# Altium PCB Copy of PCB1_ascii.pcbDoc
Units mil, origin at the board's own origin, x right, y up, seen from the top; angles counter-clockwise.
Board outline 1574.8 x 1496.06 mil, 2 copper layers (Top Layer, Bottom Layer); 38 components, 67 nets, 271 pads, 69 vias.
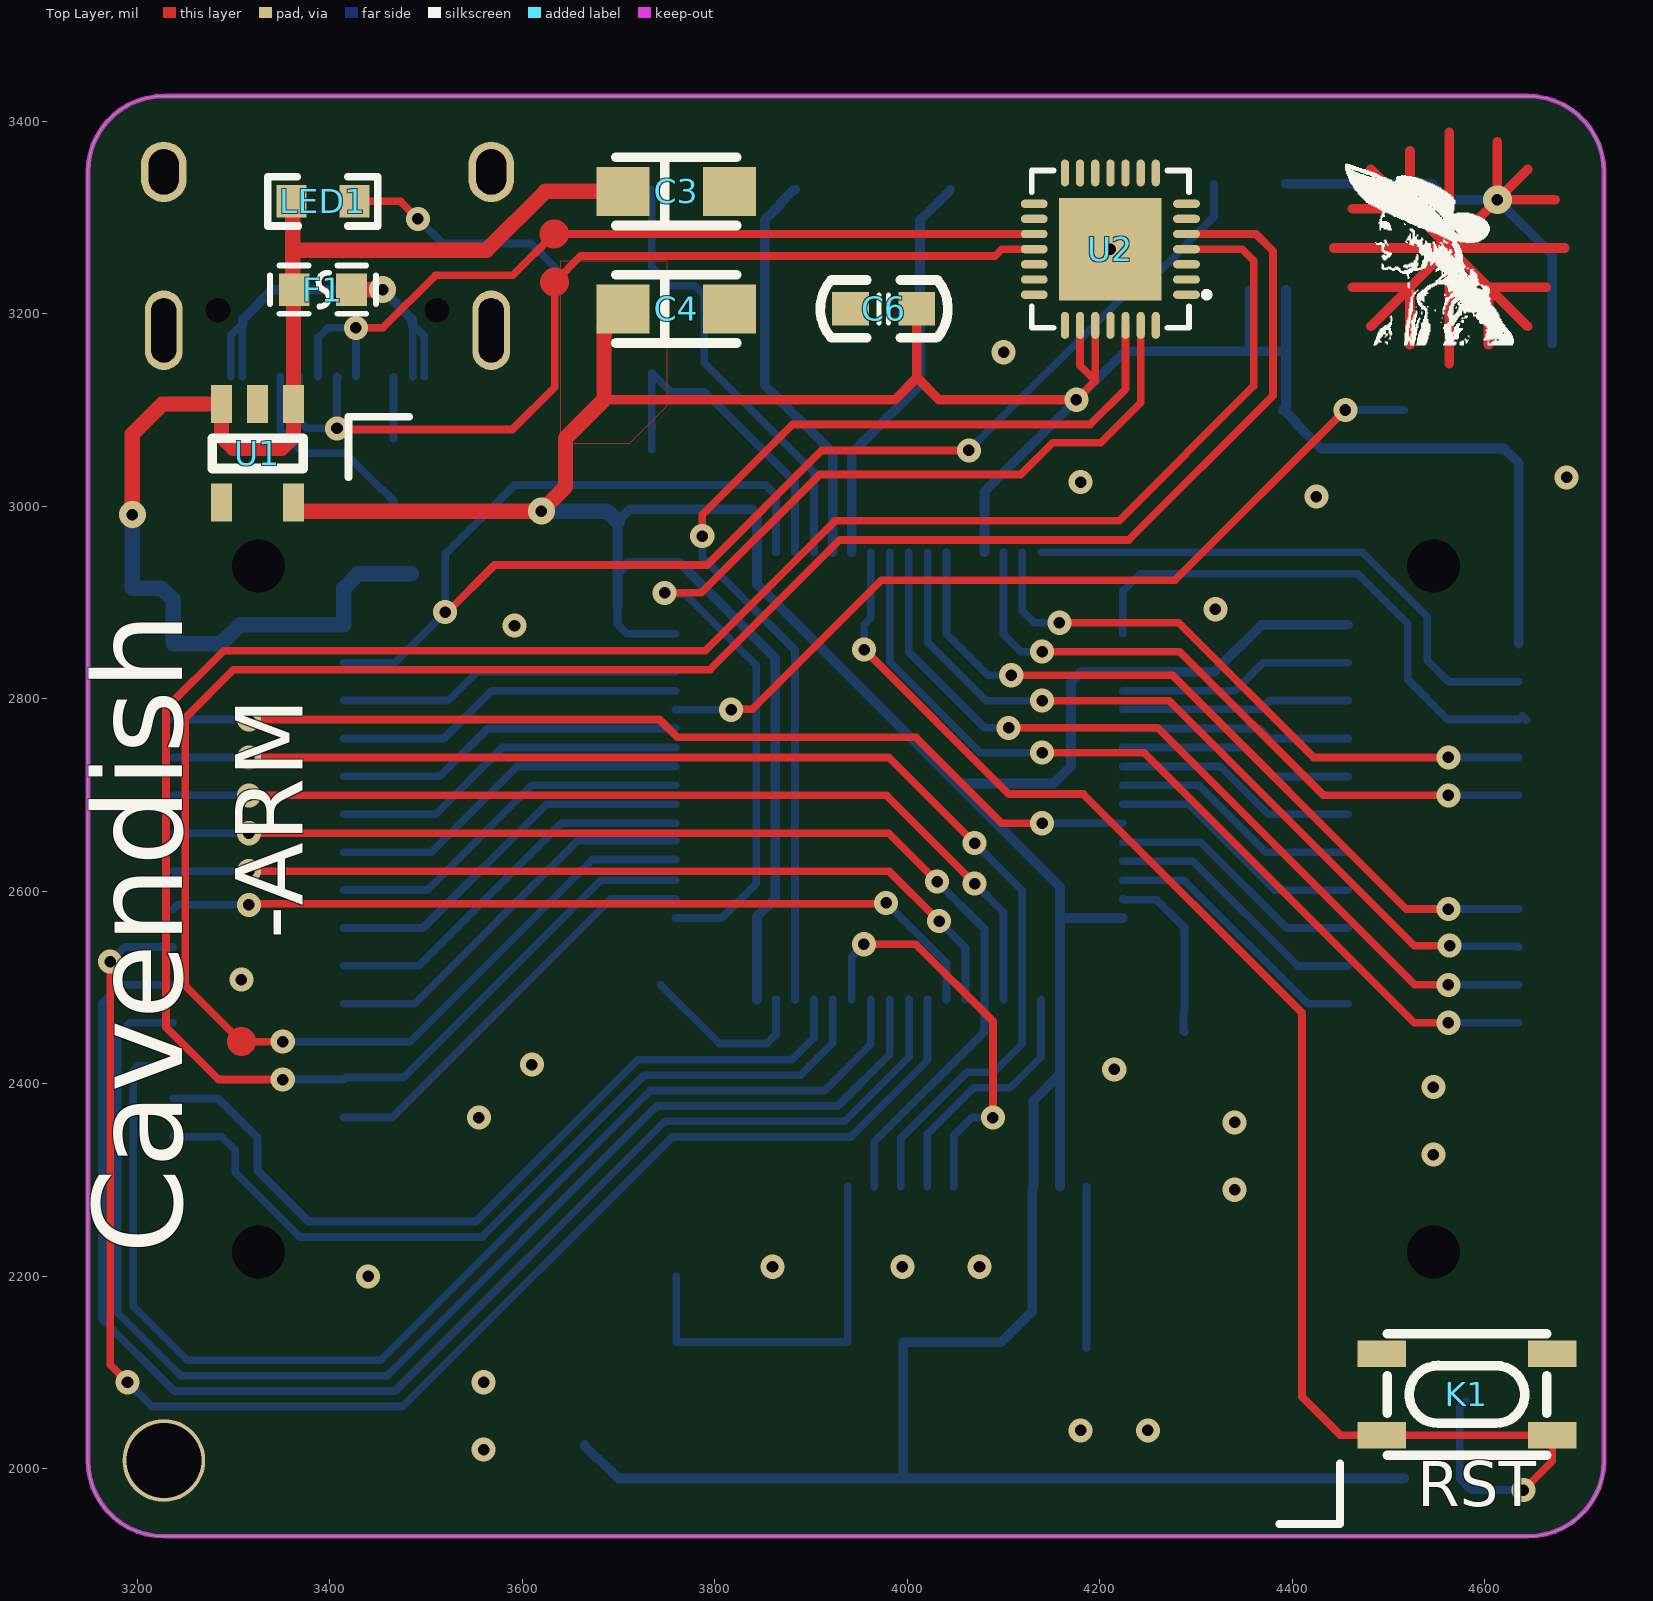
[diagram p0: Top Layer view]
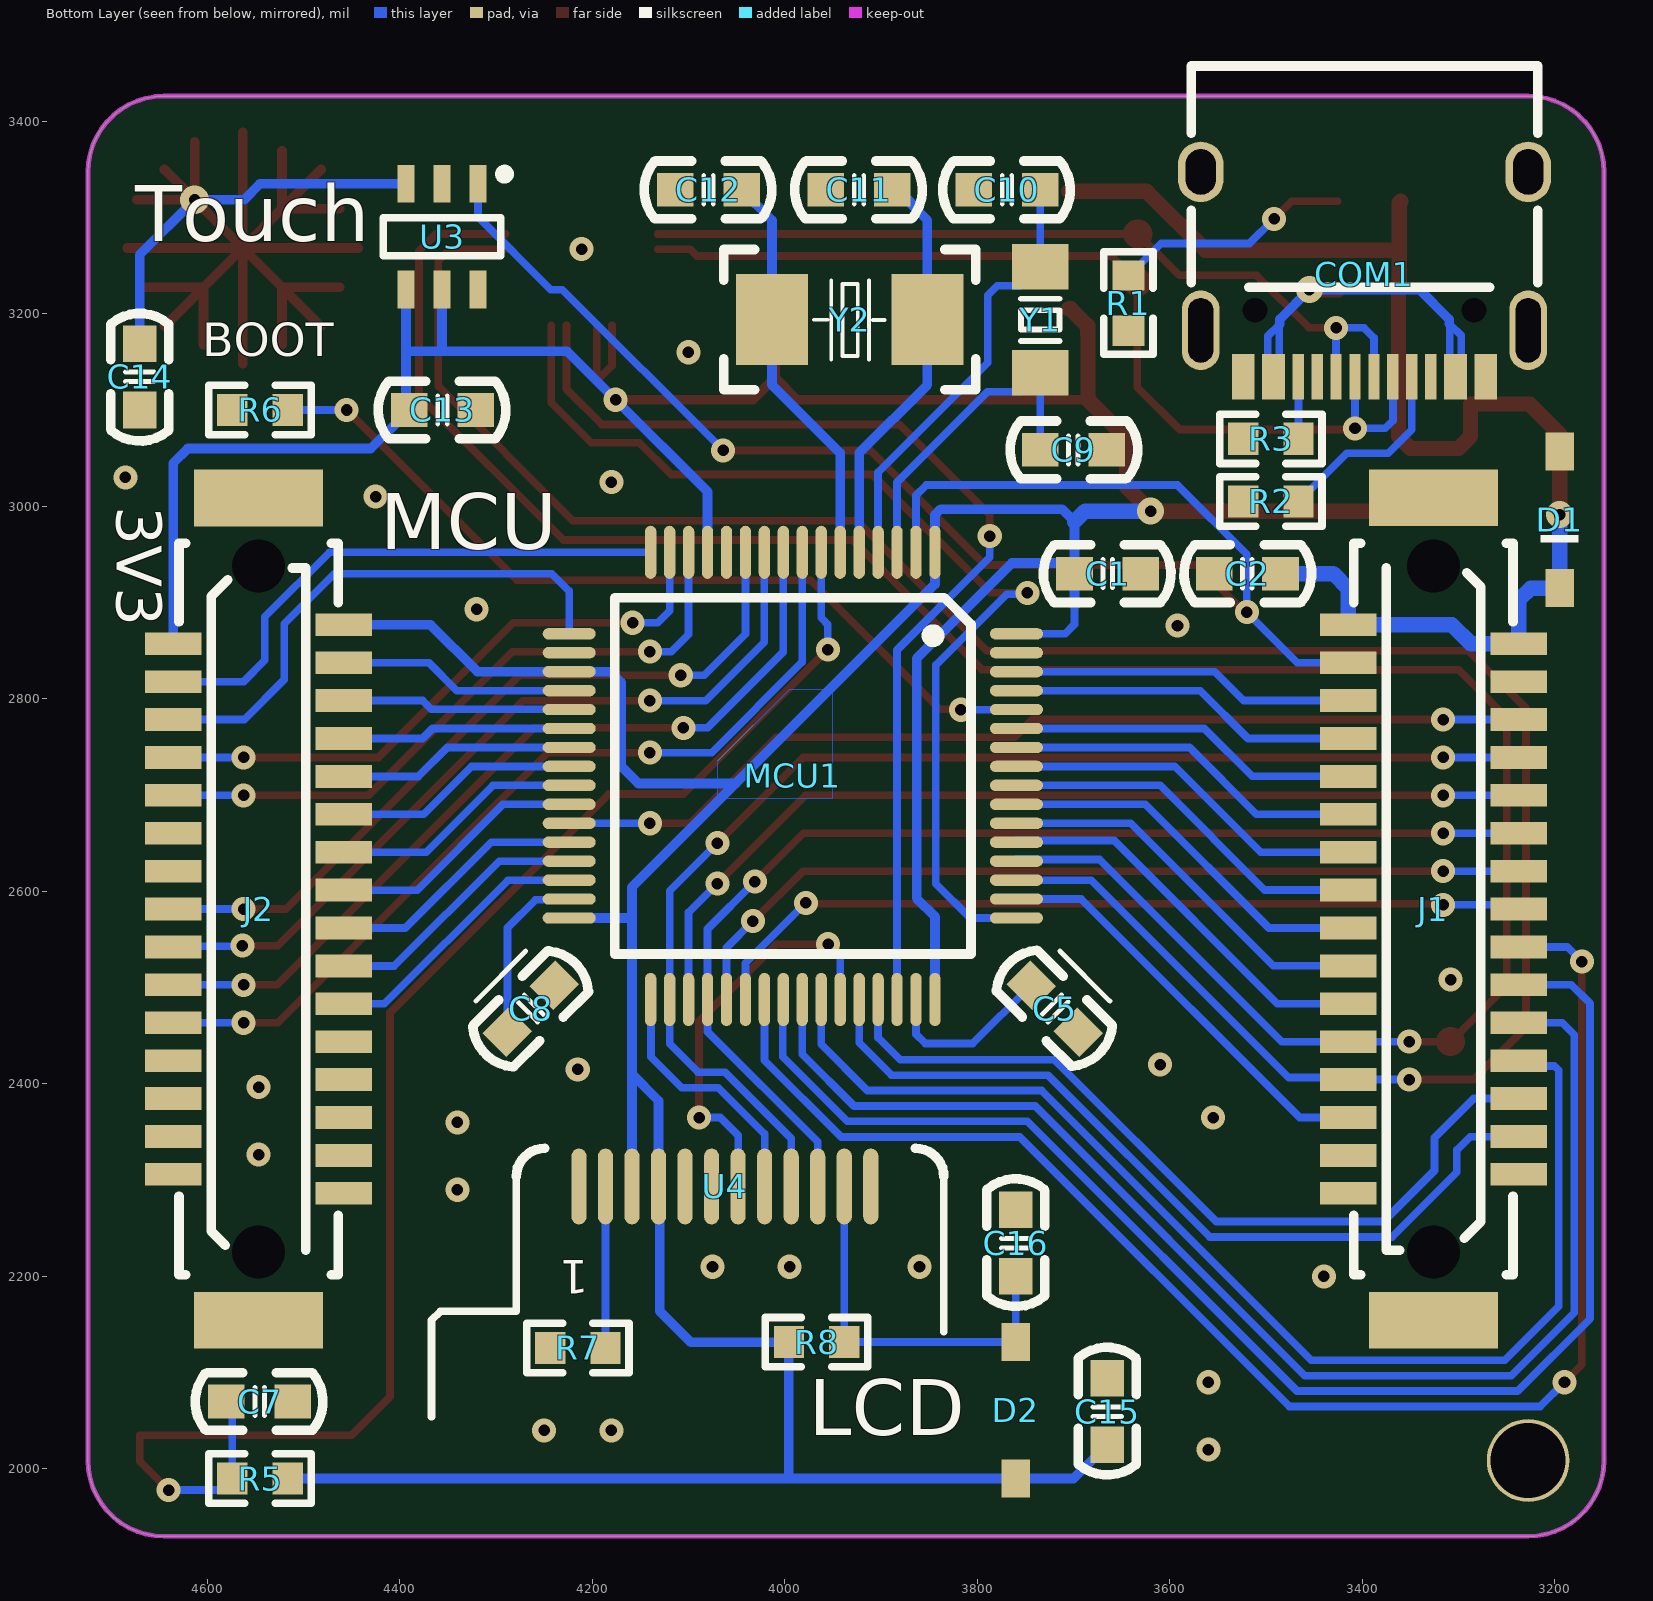
[diagram p1: Bottom Layer view, seen from below]

## Layer stack, top to bottom
Top Solder: solder mask 0.4, Solder Resist, Dk 3.5
Top Layer: signal copper 1.4
Dielectric 1: dielectric 12.6, FR-4, Dk 4.8
Bottom Layer: signal copper 1.4
Bottom Solder: solder mask 0.4, Solder Resist, Dk 3.5

## Board outline
3148.94,2008.74 ccw(c3227.68,2008.74) 3227.68,1930 4645,1930 ccw(c4645,2008.74) 4723.74,2008.74 4723.74,3347.32 ccw(c4645,3347.32) 4645,3426.06 3260.17,3426.06 3227.68,3426.06 ccw(c3227.68,3347.32) 3148.94,3347.32

## Design rules (kind name [scope] priority, off if disabled: settings)
AssemblyTestPointUsage [All] p0: scope1count=1 scope1_0_kind=Board scope1_0_value=Board scope2count=1 scope2_0_kind=Board scope2_0_value=Board commentlength=0
AssemblyTestpoint [All] p0: scope1count=1 scope1_0_kind=Board scope1_0_value=Board scope2count=1 scope2_0_kind=Board scope2_0_value=Board commentlength=0
Clearance [All] p0: scope1count=1 scope1_0_kind=Board scope1_0_value=Board scope2count=1 scope2_0_kind=Board scope2_0_value=Board commentlength=0 gap=7
Clearance [All] p1: gap=7 ignorepadtopadclearanceinfootprint=TRUE
ComponentClearance [All] p0: scope1count=1 scope1_0_kind=Board scope1_0_value=Board scope2count=1 scope2_0_kind=Board scope2_0_value=Board commentlength=0 gap=10 collisioncheckmode=3
DiffPairsRouting [All] p0: scope1count=1 scope1_0_kind=Board scope1_0_value=Board scope2count=1 scope2_0_kind=Board scope2_0_value=Board commentlength=0
FabricationTestPointUsage [All] p0: scope1count=1 scope1_0_kind=Board scope1_0_value=Board scope2count=1 scope2_0_kind=Board scope2_0_value=Board commentlength=0 valid=0 allowmultiple=FALSE
FabricationTestpoint [All] p0: scope1count=1 scope1_0_kind=Board scope1_0_value=Board scope2count=1 scope2_0_kind=Board scope2_0_value=Board commentlength=0 side=3 testpointundercomponent=TRUE minsize=40 maxsize=100 preferedsize=60 minholesize=0 maxholesize=40 preferedholesize=32 testpointgrid=1
FanoutControl Fanout_BGA [All] p0 off: scope1count=1 scope1_0_kind=Board scope1_0_value=Board scope2count=1 scope2_0_kind=Board scope2_0_value=Board commentlength=69 // Protel DXP Scope 1 Expression Was: IsBGA   Fanout_BGA (Default Rule)
FanoutControl Fanout_LCC [All] p0 off: scope1count=1 scope1_0_kind=Board scope1_0_value=Board scope2count=1 scope2_0_kind=Board scope2_0_value=Board commentlength=69 // Protel DXP Scope 1 Expression Was: IsLCC   Fanout_LCC (Default Rule)
FanoutControl Fanout_SOIC [All] p0 off: scope1count=1 scope1_0_kind=Board scope1_0_value=Board scope2count=1 scope2_0_kind=Board scope2_0_value=Board commentlength=71 // Protel DXP Scope 1 Expression Was: IsSOIC   Fanout_SOIC (Default Rule)
FanoutControl Fanout_Small [All] p0 off: scope1count=1 scope1_0_kind=Board scope1_0_value=Board scope2count=1 scope2_0_kind=Board scope2_0_value=Board commentlength=84 // Protel DXP Scope 1 Expression Was: (CompPinCount < 5)   Fanout_Small (Default Rule)
FanoutControl Fanout_Default [All] p0: scope1count=1 scope1_0_kind=Board scope1_0_value=Board scope2count=1 scope2_0_kind=Board scope2_0_value=Board commentlength=30 // Fanout_Default (Default Rule)
Height [All] p0: scope1count=1 scope1_0_kind=Board scope1_0_value=Board scope2count=1 scope2_0_kind=Board scope2_0_value=Board commentlength=0
HoleSize [All] p0: scope1count=1 scope1_0_kind=Board scope1_0_value=Board scope2count=1 scope2_0_kind=Board scope2_0_value=Board commentlength=0 absolutevalues=TRUE maxlimit=400 minlimit=1 maxpercent=80.000 minpercent=20.000
HoleSize [All] p1: absolutevalues=TRUE maxlimit=400 minlimit=1 maxpercent=80.000 minpercent=20.000
HoleToHoleClearance [All] p0: scope1count=1 scope1_0_kind=Board scope1_0_value=Board scope2count=1 scope2_0_kind=Board scope2_0_value=Board commentlength=0
HoleToHoleClearance [All] p1: gap=6 allowstackedmicrovias=TRUE
LayerPairs [All] p0: scope1count=1 scope1_0_kind=Board scope1_0_value=Board scope2count=1 scope2_0_kind=Board scope2_0_value=Board commentlength=0 enforce=TRUE
MinimumSolderMaskSliver [All] p0: scope1count=1 scope1_0_kind=Board scope1_0_value=Board scope2count=1 scope2_0_kind=Board scope2_0_value=Board commentlength=0
MinimumSolderMaskSliver [All] p1: minsoldermaskwidth=1
NetAntennae [All] p0: scope1count=1 scope1_0_kind=Board scope1_0_value=Board scope2count=1 scope2_0_kind=Board scope2_0_value=Board commentlength=0
PasteMaskExpansion [All] p0: scope1count=1 scope1_0_kind=Board scope1_0_value=Board scope2count=1 scope2_0_kind=Board scope2_0_value=Board commentlength=0 expansion=0
PlaneClearance [All] p0: scope1count=1 scope1_0_kind=Board scope1_0_value=Board scope2count=1 scope2_0_kind=Board scope2_0_value=Board commentlength=0 clearance=20
PlaneConnect [All] p0: scope1count=1 scope1_0_kind=Board scope1_0_value=Board scope2count=1 scope2_0_kind=Board scope2_0_value=Board commentlength=0 planeconnectstyle=Relief reliefexpansion=20 reliefentries=4 reliefconductorwidth=10 reliefairgap=10
PolygonConnect [All] p0: scope1count=1 scope1_0_kind=Board scope1_0_value=Board scope2count=1 scope2_0_kind=Board scope2_0_value=Board commentlength=0 connectstyle=Relief reliefconductorwidth=10 reliefentries=4 polygonreliefangle="90 Angle"
PolygonConnect [All] p1: connectstyle=Relief reliefconductorwidth=10 reliefentries=4 polygonreliefangle="90 Angle" airgapwidth=10
RoutingCorners [All] p0: scope1count=1 scope1_0_kind=Board scope1_0_value=Board scope2count=1 scope2_0_kind=Board scope2_0_value=Board commentlength=0 cornerstyle=45-Degree minsetback=100 maxsetback=100
RoutingLayers [All] p0: scope1count=1 scope1_0_kind=Board scope1_0_value=Board scope2count=1 scope2_0_kind=Board scope2_0_value=Board commentlength=0 top layer=Automatic bottom layer=Automatic
RoutingPriority [All] p0: scope1count=1 scope1_0_kind=Board scope1_0_value=Board scope2count=1 scope2_0_kind=Board scope2_0_value=Board commentlength=0
RoutingTopology [All] p0: scope1count=1 scope1_0_kind=Board scope1_0_value=Board scope2count=1 scope2_0_kind=Board scope2_0_value=Board commentlength=0 topology=Shortest
RoutingVias [All] p0: scope1count=1 scope1_0_kind=Board scope1_0_value=Board scope2count=1 scope2_0_kind=Board scope2_0_value=Board commentlength=0 holewidth=28 width=50 viastyle="Through Hole" minholewidth=12 minwidth=16 maxholewidth=28 maxwidth=50
RoutingVias [All] p1: holewidth=28 width=50 viastyle="Through Hole" minholewidth=12 minwidth=16 maxholewidth=28 maxwidth=50
ShortCircuit [All] p0: scope1count=1 scope1_0_kind=Board scope1_0_value=Board scope2count=1 scope2_0_kind=Board scope2_0_value=Board commentlength=0 allowed=FALSE
SilkToBoardRegionClearance [All] p0: scope1count=1 scope1_0_kind=Board scope1_0_value=Board scope2count=1 scope2_0_kind=Board scope2_0_value=Board commentlength=0
SilkToSilkClearance [All] p0: scope1count=1 scope1_0_kind=Board scope1_0_value=Board scope2count=1 scope2_0_kind=Board scope2_0_value=Board commentlength=0
SilkToSilkClearance [All] p1: silktosilkclearance=0
SilkToSolderMaskClearance [All] p0 off: scope1count=1 scope1_0_kind=Board scope1_0_value=Board scope2count=1 scope2_0_kind=Board scope2_0_value=Board commentlength=44 // Protel DXP Scope 1 Expression Was: IsPad
SilkToSolderMaskClearance [IsPad] p1: minsilkscreentomaskgap=0 clearancetoexposedcopper=TRUE
SolderMaskExpansion [All] p0: scope1count=1 scope1_0_kind=Board scope1_0_value=Board scope2count=1 scope2_0_kind=Board scope2_0_value=Board commentlength=0 expansion=4
SolderMaskExpansion [All] p1: expansion=4 istentingtop=FALSE
UnRoutedNet [All] p0: scope1count=1 scope1_0_kind=Board scope1_0_value=Board scope2count=1 scope2_0_kind=Board scope2_0_value=Board commentlength=0
UnpouredPolygon [All] p0: scope1count=1 scope1_0_kind=Board scope1_0_value=Board scope2count=1 scope2_0_kind=Board scope2_0_value=Board commentlength=0
Width [All] p0: scope1count=1 scope1_0_kind=Board scope1_0_value=Board scope2count=1 scope2_0_kind=Board scope2_0_value=Board commentlength=0 maxlimit=50 minlimit=8 preferedwidth=10
Width [All] p1: maxlimit=50 minlimit=8 preferedwidth=10
25 further rules are at their usual default settings.

## Components (designator, comment, footprint, x,y, rotation, side; value= is the part's Value field where it differs from the comment)
C1 "100NF" CAP_0603 3630,2930 r0 bottom
C2 "100NF" CAP_0603 3554,2930 r180 bottom
C3 "100UF" CAP_3216_A 3760,3327.02 r180 top
C4 "100UF" CAP_3216_A 3760,3205 r180 top
C5 "10UF" CAP_0603 3695.16,2453.83 r45 bottom
C6 "100NF" CAP_0603 3941,3205 r0 top
C7 "100NF" CAP_0603 4511,2070 r0 bottom
C8 "10UF" CAP_0603 4239.22,2502.62 r315 bottom
C9 "10PF" CAP_0603 3734.62,3058.59 r180 bottom
C10 "10PF" CAP_0603 3734.62,3328.63 r0 bottom
C11 "22PF" CAP_0603 3888.37,3328.63 r0 bottom
C12 "22PF" CAP_0603 4044.77,3328.63 r0 bottom
C13 "100NF" CAP_0603 4321,3100 r0 bottom
C14 "22PF" CAP_0603 4670,3169 r270 bottom
C15 "100NF" CAP_0603 3665,2025 r90 bottom
C16 "4.7UF" CAP_0603 3760,2200 r90 bottom
COM1 "Type-C" USB-Type-C_16A 3397.75,3346.33 r0 bottom
D1 "B5819W" DIODE_SOD123 3195,3056.73 r270 bottom
D2 "1N4148" DIODE_SOD123 3760,2131.73 r270 bottom
F1 "FUSE" Fuse_0603 3392.99,3225.01 r0 top
J1 "31PIN" BTB-DM3-31P 3326.1,2937.88 r270 bottom
J2 "31PIN" BTB-DM3-31P 4546.57,2225.28 r90 bottom
K1 "KEY" KEY_SMD 4492.84,2119.65 r0 top
LED1 "LED_R/G/B/Y" LED_0603_R 3392.99,3316.72 r180 top
MCU1 "STM32F405RET6" LQFP_64_10X10 3991.59,2719.9 r0 bottom
R1 "10K" RESC_0603_2 3643,3211 r90 bottom
R2 "5.1K" RESC_0603_2 3495,3005 r180 bottom
R3 "5.1K" RESC_0603_2 3495,3070 r180 bottom
R5 "10K" RESC_0603_2 4545,1990 r0 bottom
R6 "10K" RESC_0603_2 4545,3100 r0 bottom
R7 "20R" RESC_0603_2 4214.92,2125.63 r180 bottom
R8 "4.7K" RESC_0603_2 3966.89,2131.73 r180 bottom
U1 "SPX3819M5-L" SOT23_5 3325,3055 r90 top
U2 "CH549F" QFN28_4X4_L 4290.1,3219.8 r180 top
U3 "TTP223" SOT-23-6 4318.6,3335 r270 bottom
U4 "TFT_1.3_12Pin" LCD_1.3B 4233.74,2313.06 r180 top
Y1 "32KHz" XTAL_SMD_3215 3734.62,3193.61 r270 bottom
Y2 "8MHz" XTAL-SMD5032-2P 3932.53,3193.84 r180 bottom

## Footprints (in the part's own frame and the unit in brackets; to place one, negate y for a bottom-side part, rotate by r counter-clockwise, add the part's x,y. Pads: shape width x height; smd on the part's side, far side on the other; paste and mask are expansions set on the pad)
BTB-DM3-31P [mm]
  rect 0.6x1.5 smd: 1(1.55,-2.25) 2(2.05,2.25) 3(2.55,-2.25) 4(3.05,2.25) 5(3.55,-2.25) 6(4.05,2.25) 7(4.55,-2.25) 8(5.05,2.25) 9(5.55,-2.25) 10(6.05,2.25) 11(6.55,-2.25) 12(7.05,2.25) 13(7.55,-2.25) 14(8.05,2.25) 15(8.55,-2.25) 16(9.05,2.25) 17(9.55,-2.25) 18(10.05,2.25) 19(10.55,-2.25) 20(11.05,2.25) 21(11.55,-2.25) 22(12.05,2.25) 23(12.55,-2.25) 24(13.05,2.25) 25(13.55,-2.25) 26(14.05,2.25) 27(14.55,-2.25) 28(15.05,2.25) 29(15.55,-2.25) 30(16.05,2.25) 31(16.55,-2.25)
  rect 1.5x3.4 smd: 32(19.9,0) 33(-1.8,0)
  round 1.219 hole 1.4 unplated: ""(0,0) ""(18.1,0)
  silkscreen extent -0.6,-2.1 18.7,2.1
CAP_0603 [mil]
  rect 38x35 smd: 1(0,0) 2(69,0)
  silkscreen extent -31,-30 101,30
CAP_3216_A [mm]
  rect 1.4x1.3 smd: 1(1.4,0) 2(-1.4,0)
  silkscreen extent -1.6,-0.9 1.6,0.9
DIODE_SOD123 [mm]
  rect 1x0.75 smd: 1(0,0) 2(3.6,0)
  silkscreen extent 2.2,-0.5 2.4,0.5
Fuse_0603 [mil]
  rect 31.8x34 smd mask+0: 1(-29.7,0) 2(29.7,0)
  silkscreen extent -55,-25 55,25
KEY_SMD [mm] "3*4*2.5MM"
  rect 1.27x0.7 smd: 1(0,0) 1(4.5,0) 2(0,-2.15) 2(4.5,-2.15)
  silkscreen extent 0.15,-2.68 4.35,0.52
LCD_1.3B [mm]
  oval 0.4x2 smd far side: 1(0.508,0.5) 2(1.208,0.5) 3(1.908,0.5) 4(2.608,0.5) 5(3.308,0.5) 6(4.008,0.5) 7(4.708,0.5) 8(5.408,0.5) 9(6.108,0.5) 10(6.808,0.5) 11(7.508,0.5) 12(8.208,0.5)
  silkscreen extent -5.48,-19.81 20.68,9.41
LED_0603_R [mm]
  rect 0.8x0.85 smd: 1(-0.832,0) 2(0.832,0)
  silkscreen extent -1.45,-0.65 1.45,0.65
LQFP_64_10X10 [mm]
  oval 0.3x1.4 smd: 1(-3.75,-5.9) 2(-3.25,-5.9) 3(-2.75,-5.9) 4(-2.25,-5.9) 5(-1.75,-5.9) 6(-1.25,-5.9) 7(-0.75,-5.9) 8(-0.25,-5.9) 9(0.25,-5.9) 10(0.75,-5.9) 11(1.25,-5.9) 12(1.75,-5.9) 13(2.25,-5.9) 14(2.75,-5.9) 15(3.25,-5.9) 16(3.75,-5.9) 33(3.75,5.9) 34(3.25,5.9) 35(2.75,5.9) 36(2.25,5.9) 37(1.75,5.9) 38(1.25,5.9) 39(0.75,5.9) 40(0.25,5.9) 41(-0.25,5.9) 42(-0.75,5.9) 43(-1.25,5.9) 44(-1.75,5.9) 45(-2.25,5.9) 46(-2.75,5.9) 47(-3.25,5.9) 48(-3.75,5.9)
  oval 1.4x0.3 smd: 17(5.9,-3.75) 18(5.9,-3.25) 19(5.9,-2.75) 20(5.9,-2.25) 21(5.9,-1.75) 22(5.9,-1.25) 23(5.9,-0.75) 24(5.9,-0.25) 25(5.9,0.25) 26(5.9,0.75) 27(5.9,1.25) 28(5.9,1.75) 29(5.9,2.25) 30(5.9,2.75) 31(5.9,3.25) 32(5.9,3.75) 49(-5.9,3.75) 50(-5.9,3.25) 51(-5.9,2.75) 52(-5.9,2.25) 53(-5.9,1.75) 54(-5.9,1.25) 55(-5.9,0.75) 56(-5.9,0.25) 57(-5.9,-0.25) 58(-5.9,-0.75) 59(-5.9,-1.25) 60(-5.9,-1.75) 61(-5.9,-2.25) 62(-5.9,-2.75) 63(-5.9,-3.25) 64(-5.9,-3.75)
  silkscreen extent -4.7,-4.7 4.7,4.7
QFN28_4X4_L [mil]
  oval 28x8.6 smd mask+0: 1(0,0) 2(0,-15.7) 3(0,-31.5) 4(0,-47.2) 5(0,-63) 6(0,-78.7) 7(0,-94.4) 15(158.2,-94.4) 16(158.2,-78.7) 17(158.2,-63) 18(158.2,-47.2) 19(158.2,-31.5) 20(158.2,-15.7) 21(158.2,0)
  oval 8.6x28 smd mask+0: 8(31.9,-126.3) 9(47.6,-126.3) 10(63.4,-126.3) 11(79.1,-126.3) 12(94.9,-126.3) 13(110.6,-126.3) 14(126.3,-126.3) 22(126.3,31.9) 23(110.6,31.9) 24(94.9,31.9) 25(79.1,31.9) 26(63.4,31.9) 27(47.6,31.9) 28(31.9,31.9)
  rect 106.3x106.3 smd mask+0: 29(79.1,-47.2)
  silkscreen extent -24,-129 161,35
RESC_0603_2 [mm]
  rect 0.8x0.85 smd: 1(-0.73,0) 2(0.73,0)
  silkscreen extent -1.35,-0.65 1.35,0.65
SOT23_5 [mm]
  rect 1x0.55 smd: 1(1.3,-0.95) 2(1.3,0) 3(1.3,0.95) 4(-1.3,0.95) 5(-1.3,-0.95)
  silkscreen extent -0.4,-1.21 0.4,1.19
SOT-23-6 [mm]
  rect 1x0.45 smd: 1(0,0) 2(0,-0.95) 3(0,-1.9) 4(2.794,-1.9) 5(2.794,-0.95) 6(2.794,0)
  silkscreen extent -0.38,-2.5 1.91,0.82
USB-Type-C_16A [mm]
  round 0 hole 0.65: 0(-2.89,3.625) 0(2.89,3.625)
  oval 1.2x1.6 hole 0.8 slot 1.2 at 90 deg: 1(-4.32,-0.025) 1(4.32,-0.025)
  oval 1x2.1 hole 0.66 slot 1.7 at 90 deg: 1(-4.32,4.155) 1(4.32,4.155)
  rect 0.3x1.2 smd: A1(-3.35,5.375) A4(-2.55,5.375) A5(-1.25,5.375) A6(-0.25,5.375) A7(0.25,5.375) A8(-1.75,5.375) A9(2.55,5.375) A12(3.35,5.375) B1(3.05,5.375) B4(2.25,5.375) B5(1.75,5.375) B6(0.75,5.375) B7(-0.75,5.375) B8(1.25,5.375) B9(-2.25,5.375) B12(-3.05,5.375)
  silkscreen extent -4.57,-2.82 4.57,3.02
XTAL-SMD5032-2P [mil]
  rect 74.8x94.5 smd mask+0: 1(-80.7,0) 2(80.7,0)
  silkscreen extent -131,-73 131,73
XTAL_SMD_3215 [mm]
  rect 1.2x1.5 smd: 1(-1.4,0) 2(1.4,0)
  silkscreen extent -0.56,-0.51 0.56,0.51

## Part data
C1 C2 C5 C6 C7 C8 C9 C10 C11 C12 C13 C14 C15 C16: library part CAP, "CAP  12~50V"
C3 C4: library part CAP_TA, "CAP  6~12V  钽电容"
COM1: library part USB-type_c, "USB"
D1 D2: library part Diode-SM, "Diode_肖特基/二极管"
J1 J2: library part BTB_DF3_31Pin, "BTB"
K1: "Key"
LED1: library part LED_SMT, "LED"
MCU1: library part STM32f4_R, "MCU"
R1 R5 R6 R7 R8: library part RES_S, "RES 贴片"
R2 R3: library part RES, "RES 贴片"
U1: "DC-DC   3.3V  500ma"
U2: "MCU"
U3: "触摸芯片"
U4: library part "LCD_1.3   T", "ST7789V-SPI"
Y1 Y2: library part XTAL, "CRYSTAL"

## Free pads (board coordinates)
  round 86 hole 78: 0(3227.68,2008.74)

## Via types
v1: diameter 25, hole 12, Top Layer to Bottom Layer, tented both sides, 64 vias
v2: diameter 28, hole 12, Top Layer to Bottom Layer, tented both sides, 3 vias
v3: diameter 30, hole 12, Top Layer to Bottom Layer, tented both sides, 1 vias
v4: diameter 25, hole 12, Top Layer to Bottom Layer, 1 vias

## Nets (pads, with @x,y where several pads share a name; then routed paths per layer and width w, separated by ;. In a path a pad name is that pad's centre, name@x,y a point inside that pad or via, vN(x,y) a via of type N, cw(c..) or ccw(c..) an arc to the next point about the centre after c; other vN are vias at no path point)
+5: C2.2 C3.1 D1.2 F1.1 J1.1 J1.2 LED1.2 U1.1 U1.3 | length 1396.5
  Top Layer w16: v2@3195,2985 v2(3195,2991.22) 3195,3075 3226.18,3106.18 U1.3 3287.6,3072.4 3300,3060 3350,3060 3362.4,3072.4 U1.1 F1.1@3362.4,3225 ; LED1.2 3361.77,3315.2 3361.77,3226.53 F1.1 ; 3362.57,3266.07 3563.07,3266.07 3624.02,3327.02 C3.1
  Bottom Layer w16: v2(3195,2991.22) D1.2 3225,2915 3237.52,2902.48 J1.2 3287.17,2857.17 3306.86,2876.86 J1.1 3414.69,2914.69 3430,2930 C2.2
BOOT0: MCU1.60 R6.1 | length 886
  Top Layer w8: v1(3816.97,2788.58) 3817.39,2789 3839,2789 3973,2923 4278,2923 v1(4455,3100)
  Bottom Layer w8: MCU1.60 3759.52,2788.58 v1(3816.97,2788.58) ; v1(4455,3100) R6.1
BOOT1: J2.15 MCU1.28 | length 271
  Bottom Layer w8: MCU1.28 4305,2651 4394.11,2561.89 J2.15
CAN_RX: J1.28 MCU1.44 | length 870.3
  Bottom Layer w8: J1.28 3237.88,2345 3288,2345 3301.8,2331.2 3301.8,2308.2 3369,2241 3558.49,2241 3726.49,2409 3889,2409 3922.69,2442.69 MCU1.44
CAN_TX: J1.26 MCU1.45 | length 857
  Bottom Layer w8: J1.26 3284.27,2384.73 3325,2344 3325,2310 3378,2257 3551.86,2257 3719.86,2425 3880,2425 3903,2448 MCU1.45
CC1: COM1.A5 R2.2 | length 204.4
  Bottom Layer w8: COM1.A5 3348.54,3079.46 3373,3055 3416.26,3055 3453.53,3017.73 3454.51,3017.73 3466.26,3005.98 R2.2
CC2: COM1.B5 R3.2 | length 64.3
  Bottom Layer w8: R3.2 COM1.B5@3466.26,3134.33
CH_RXD: J1.25 MCU1.51 U2.4 | length 2442.4
  Top Layer w8: v1(3351.22,2404.41) 3284.59,2404.41 3230,2459 3230,2790 3290,2850 3790,2850 3925,2985 4220,2985 4360,3125 4360,3255 4348,3267 U2.4
  Bottom Layer w8: v1(3351.22,2404.41) J1.25 3416.8,2406.53 3476.53,2406.53 3681.63,2611.63 MCU1.51
CH_TXD: J1.23 MCU1.52 U2.5 | length 2406.3
  Top Layer w8: v1(3351.22,2443.78) 3308.22,2443.78 3250,2502 3250,2780 3300,2830 3795,2830 3930,2965 4230,2965 4380,3115 4380,3265 4362.2,3282.8 U2.5
  Top Layer w30: 3308.22,2443.78 3308.49,2444.06
  Bottom Layer w8: v1(3351.22,2443.78) J1.23 3483.78,2443.78 3673.1,2633.1 MCU1.52@3759.3,2633.1
D+: COM1.A6 COM1.B6 U2.17 | length 879.9
  Top Layer w8: v1(3427.28,3185.31) 3455.31,3185.31 3510,3240 3590.31,3240 3633.11,3282.8 U2.17
  Top Layer w30: 3633.11,3282.8 3633.39,3283.08
  Bottom Layer w8: COM1.A6 3387.91,3174.91 3398.31,3185.31 v1(3427.28,3185.31) COM1.B6
D-: COM1.A7 COM1.B7 U2.18 | length 1008.6
  Top Layer w8: v1@3408.78,3079.69 3589.69,3079.69 3633.69,3123.69 3633.69,3232.69 ; 3633.82,3232.82 3661,3260 4091.2,3260 4098,3266.8 ; 4098,3267 U2.18
  Top Layer w30: 3633.69,3232.69 3633.82,3232.82
  Bottom Layer w8: COM1.B7 3368.23,3088.77 3376.13,3080.87 v1(3407.6,3080.87) COM1.A7 COM1.A7@3408.78,3133.53
D/C: MCU1.43 U4.7 | length 431.1
  Top Layer w8: v1(3955,2545) 4009,2545 4089,2465 v1(4089,2365)
  Bottom Layer w8: MCU1.43 3942.37,2531.81 3955,2544.44 v1(3955,2545) ; U4.7 4048.39,2346.39 4067,2365 v1(4089,2365)
DAC_OUT1: J2.29 MCU1.20 | length 246.1
  Bottom Layer w8: MCU1.20 4340.48,2808.48 4369.48,2837.48 J2.29
DAC_OUT2: J2.27 MCU1.21 | length 238
  Bottom Layer w8: MCU1.21 4224.07,2789 4367,2789 4376.11,2798.11 J2.27
DIR: J2.21 MCU1.24 | length 254.7
  Bottom Layer w8: MCU1.24 4325.26,2729.74 4375,2680 J2.21
GND: C1.1 C2.1 C3.2 C4.2 C5.1 C6.1 C7.1 C8.1 C9.2 C10.2 C11.2 C12.2 C13.1 C14.2 C15.2 C16.2 COM1.1 COM1.A1 COM1.A12 COM1.B1 COM1.B12 D1.1 J1.29 J1.32 J1.33 J2.3 J2.4 J2.32 J2.33 K1.1 MCU1.12 MCU1.18 MCU1.63 pad.0 R1.1 R2.1 R3.1 R6.2 R7.1 U1.2 U2.29 U3.2 U3.6 U4.1 U4.5 U4.6 U4.12
  other v1: 3560,2020 4180,2040 4250,2040 3560,2090 3440,2200 3860,2210 3995,2210 4075,2210 4340,2290 4546.57,2326.57 4340,2360 3555,2365 4546.57,2396.57 4215,2415 3610,2420 3592,2876 4320,2893 4425,3010 4180,3025 4685,3030 4100,3160 4211,3267
  other v4: 3308.22,2508.22
GPIOA: J1.15 MCU1.56 | length 389.7
  Bottom Layer w8: J1.15 3501.27,2601.27 3610.06,2710.06 MCU1.56
GPIOB: J1.13 MCU1.57 | length 381.5
  Bottom Layer w8: J1.13 3505.64,2640.64 3594.74,2729.74 MCU1.57
MISO_2: J1.10 MCU1.35 | length 1003.2
  Top Layer w8: v1(3316,2699.69) 3978.31,2699.69 v1(4070,2608)
  Bottom Layer w8: J1.10 v1(3316,2699.69) ; v1(4070,2608) 4099.85,2578.15 MCU1.35
MOSI_2: J1.12 MCU1.36 U4.10 | length 1201.5
  Top Layer w8: v1(3316,2660.32) 3980.68,2660.32 v1(4031,2610) v1@4033,2608
  Bottom Layer w8: J1.12 v1(3316,2660.32) ; U4.10 3965.71,2339.74 4080.17,2454.2 4080.17,2560.83 v1(4031,2610)
NetC5_2: C5.2 MCU1.47 | length 184.8
  Bottom Layer w8: C5.2 3804.56,2442 3854,2442 3863.63,2451.63 MCU1.47
NetC8_2: C8.2 MCU1.31 | length 185.6
  Bottom Layer w8: MCU1.31 4224.6,2591.22 4258.8,2591.22 4288.01,2562 4288.01,2475.04 4286.95,2473.98 4286.95,2454.89 C8.2
NetLED1_1: LED1.1 R1.2 | length 249.2
  Top Layer w8: LED1.1 3473.49,3316.72 v1(3491.68,3298.52)
  Bottom Layer w8: v1(3491.68,3298.52) 3517.2,3273 3608.76,3273 3642.02,3239.74 R1.2
NetR7_2: R7.2 U4.2 | length 167.7
  Bottom Layer w8: R7.2 U4.2
NRST: C7.2 K1.2 MCU1.7 R5.2 | length 1613.9
  Top Layer w8: v1(3955.15,2851.15) 4105.31,2701 4183,2701 4410,2474 4410,2075 4450,2035 4492.83,2035 4670,2035 4670,2008 v1(4640,1978)
  Bottom Layer w8: v1(3955.15,2851.15) 3955.15,2877.15 3962.06,2884.06 MCU1.7 ; C7.2 4573.74,2063.74 4573.74,1989.75 4585.49,1978 v1(4640,1978)
NSS_2: MCU1.33 U4.8 | length 265.5
  Bottom Layer w8: U4.8 4020.83,2347.83 4069,2396 4107,2396 4139,2428 4139,2487.39 MCU1.33
NSS_2_2: J1.6 MCU1.27 | length 1031
  Top Layer w8: v1(3316,2778.43) 3742.63,2778.43 3761.06,2760 4009,2760 4098.31,2670.69 v1(4140,2670.69)
  Bottom Layer w8: J1.6 v1(3316,2778.43) ; v1(4140,2670.69) MCU1.27
NSS_2_3: J2.17 MCU1.26 | length 271
  Bottom Layer w8: MCU1.26 4292.63,2690.37 4381.74,2601.26 J2.17
PC00: J2.10 MCU1.8 | length 922.6
  Top Layer w8: v1(4140,2744) 4246,2744 4526.54,2463.46 v1(4562,2463.46)
  Bottom Layer w8: MCU1.8 3981.74,2838.26 4076,2744 v1(4140,2744) ; v1(4562,2463.46) J2.10
PC01: J2.12 MCU1.9 | length 880.5
  Top Layer w8: v1(4105.18,2769.82) 4260.18,2769.82 4527.17,2502.83 v1(4562,2502.83)
  Bottom Layer w8: MCU1.9 4001.43,2848.57 4080.18,2769.82 v1(4105.18,2769.82) ; v1(4562,2502.83) J2.12
PC02: J2.14 MCU1.10 | length 838.5
  Top Layer w8: v1(4140,2798) 4272,2798 4526.49,2543.51 v1(4563.31,2543.51)
  Bottom Layer w8: MCU1.10 4021.11,2858.89 4082,2798 v1(4140,2798) ; v1(4563.31,2543.51) 4563.96,2542.86 4634.5,2542.86 J2.14
PC03: J2.16 MCU1.11 | length 797.6
  Top Layer w8: v1(4108,2824.46) 4275.54,2824.46 4518.43,2581.57 v1(4562,2581.57)
  Bottom Layer w8: MCU1.11 4040.8,2867.2 4083.54,2824.46 v1(4108,2824.46) ; v1(4562,2581.57) J2.16
PC12: J1.21 MCU1.53 | length 414.9
  Bottom Layer w8: J1.21 3488.15,2483.15 3657.78,2652.78 MCU1.53@3759.3,2652.78
PC13: J1.3 MCU1.2 U3.1 | length 1627.2
  Top Layer w8: v1(3520,2890) 3522.19,2890 3571.19,2939 3792,2939 3911,3058 v1(4064,3058)
  Bottom Layer w8: J1.3 3467.49,2837.49 v1(3520,2890) 3520,2950 3592,3022 3853,3022 3863.63,3011.37 MCU1.2 ; v1(4064,3058) 4231,3225 4243,3225 4318.6,3300.6 U3.1
PD02: J1.19 MCU1.54 | length 406
  Bottom Layer w8: J1.19 3492.53,2522.53 3640.69,2670.69 MCU1.54
RES: C16.1 D2.1 R8.2 U4.11 | length 408.1
  Bottom Layer w8: C16.1 D2.1 R8.2 U4.11
SCK_2: J1.8 MCU1.34 U4.9 | length 1315.2
  Top Layer w8: v1(3316,2739.06) 3980.94,2739.06 v1(4070,2650)
  Bottom Layer w8: J1.8 v1(3316,2739.06) ; U4.9 3993.27,2343.27 4062,2412 4090,2412 4119.54,2441.54 MCU1.34 4119.54,2600.46 v1(4070,2650)
SCL_2: J2.13 MCU1.29 | length 279.2
  Bottom Layer w8: MCU1.29 4296.68,2631.32 4405.48,2522.52 J2.13
SDA_2: J2.11 MCU1.30 | length 287.3
  Bottom Layer w8: MCU1.30 4287.37,2611.63 4415.85,2483.15 J2.11
STEP: J2.19 MCU1.25 | length 262.9
  Bottom Layer w8: MCU1.25 4302.94,2710.06 4372.37,2640.63 J2.19
SWCLK: MCU1.49 U2.27 | length 1108.3
  Top Layer w8: v1(3748,2910) 3786,2910 3909,3033 4118,3033 4151,3066 4201,3066 4242.5,3107.5 U2.27
  Bottom Layer w8: v1(3748,2910) 3749.42,2908.58 3769.42,2908.58 3843,2835 3843,2608 3807.26,2572.26 MCU1.49
SWDIO: MCU1.46 U2.26 | length 1103.3
  Top Layer w8: v1(3787,2969) 3787,2991 3881,3085 4190,3085 4226.7,3121.7 U2.26
  Bottom Layer w8: v1(3787,2969) 3787,2947 3883.32,2850.68 MCU1.46
TM1_CH1: J1.22 MCU1.41 | length 1375.4
  Bottom Layer w8: J1.22 3192.47,2463.47 3180,2451 3180,2162.26 3245.37,2096.89 3459.63,2096.89 3739.75,2377 3928,2377 3981.74,2430.74 MCU1.41
TM1_CH2: J1.24 MCU1.42 | length 1262.5
  Bottom Layer w8: J1.24 3232.06,2418.63 3200.68,2418.63 3196,2413.95 3196,2168.89 3251.99,2112.89 3453.01,2112.89 3733.12,2393 3914,2393 3962.06,2441.06 MCU1.42
TM2_CH1: J1.27 MCU1.50 | length 438.6
  Bottom Layer w8: J1.27 3465.04,2365.04 3691.95,2591.95 MCU1.50
TM2_CH2: J1.17 MCU1.55 | length 397.8
  Bottom Layer w8: J1.17 3496.9,2561.9 3625.37,2690.37 MCU1.55
TM3_CH1: J2.25 MCU1.22 | length 238.4
  Bottom Layer w8: MCU1.22 4365.89,2769.11 4376.26,2758.74 J2.25
TM3_CH2: J2.23 MCU1.23 | length 246.6
  Bottom Layer w8: MCU1.23 4350.57,2749.43 4380.63,2719.37 J2.23
TM4_CH1: J1.11 MCU1.58 | length 373.4
  Bottom Layer w8: J1.11 3510.01,2680.01 3579.43,2749.43 MCU1.58
TM4_CH2: J1.9 MCU1.59 | length 365.2
  Bottom Layer w8: J1.9 3514.38,2719.38 3564.11,2769.11 MCU1.59
TM4_CH3: J1.7 MCU1.61 | length 365.2
  Bottom Layer w8: J1.7 3518.75,2758.75 3568.48,2808.48 MCU1.61
TM4_CH4: J1.5 MCU1.62 | length 357.1
  Bottom Layer w8: J1.5 3523.12,2798.12 3553.17,2828.17 MCU1.62
TM5_CH1: J2.22 MCU1.14 | length 689.7
  Top Layer w8: v1(4140,2848.96) 4283.04,2848.96 4432.32,2699.68 v1(4562,2699.68)
  Bottom Layer w8: MCU1.14 4099.85,2867.15 4118.04,2848.96 v1(4140,2848.96) ; v1(4562,2699.68) J2.22
TM5_CH2: J2.24 MCU1.15 | length 639.5
  Top Layer w8: v1(4158,2879) 4282,2879 4421.95,2739.05 v1(4562,2739.05)
  Bottom Layer w8: MCU1.15 4119.54,2891.46 4132,2879 v1(4158,2879) ; v1(4562,2739.05) J2.24
TM8_CH1: J1.14 MCU1.37 | length 918.2
  Top Layer w8: v1(3316,2620.95) 3981.05,2620.95 v1(4033,2569)
  Bottom Layer w8: J1.14@3243.47,2615 J1.14 v1(3316,2620.95) ; v1(4033,2569) 4060.48,2541.52 MCU1.37
TM8_CH2: J1.16 MCU1.38 | length 870.6
  Top Layer w8: v1(3316,2586) 3317,2587 3977,2587 v1(3978,2588)
  Bottom Layer w8: J1.16 3241.94,2586 v1(3316,2586) ; v1(3978,2588) 4040.8,2525.2 MCU1.38 MCU1.38@4040.07,2488.34
TM8_CH3: J1.18 MCU1.39 | length 1569.9
  Top Layer w8: v1(3172,2527) 3172,2108.19 3190,2090.19 v1(3190,2090)
  Bottom Layer w8: v1(3172,2527) 3187.21,2542.21 J1.18 ; v1(3190,2090) 3215.11,2064.89 3475.89,2064.89 3755.75,2344.75 3941.38,2344.75 4021.06,2424.43 MCU1.39 MCU1.39
TM8_CH4: J1.20 MCU1.40 | length 1482.8
  Bottom Layer w8: J1.20 3182.84,2502.84 3163.44,2483.44 3163.44,2156.19 3238.74,2080.89 3467.89,2080.89 3748,2361 3935,2361 4002,2428 4002,2487.04 MCU1.40
Touch: C14.1 U3.3 | length 1820.4
  Top Layer w10: 4443,3268.32 4563,3268.32 ; 4462.26,3227.58 4522.26,3227.58 4522.26,3167.58 ; 4462.26,3309.06 4522.26,3309.06 ; 4481.52,3186.84 4563,3268.32 ; 4481.52,3349.81 4522.26,3309.06 ; 4522.26,3369.06 4522.26,3309.06 ; 4563,3148.32 4563,3268.32 ; 4563,3388.32 4563,3268.32 ; 4603.74,3167.58 4603.74,3227.58 4663.74,3227.58 ; 4613,3378.32 v3(4613,3318.32) 4673,3318.32 ; 4644.48,3186.84 4563,3268.32 ; 4644.48,3349.81 4563,3268.32 ; 4683,3268.32 4563,3268.32 ; 4522.26,3309.06 4563,3268.32
  Bottom Layer w10: U3.3 4545,3335 4561.68,3318.32 v3(4613,3318.32) 4670,3261.32 C14.1
UART-RXD2: J2.26 MCU1.17 | length 565.9
  Bottom Layer w8: MCU1.17 4223.87,2911.87 4242,2930 4468,2930 4520,2878 4520,2820 4561.58,2778.42 J2.26 ; J2.26@4639,2782.27 J2.26@4643.28,2778
UART-TXD2: J2.28 MCU1.16 | length 578
  Bottom Layer w8: MCU1.16 4472.82,2952.18 4540,2885 4540,2840 4562.21,2817.79 J2.28
VBUS: COM1.A4 COM1.A9 COM1.B4 COM1.B9 F1.2 | length 468.6
  Top Layer w16: F1.2@3424.7,3225 v2(3455,3225)
  Bottom Layer w8: COM1.A4 3297.36,3177.36 3309.17,3189.17 COM1.B9 ; COM1.B4 3486.34,3188.66 3498.15,3176.85 COM1.A9
  Bottom Layer w10: 3309.78,3189.78 3309.78,3194.27 3340.51,3225 v2(3455,3225) 3485.73,3194.27 3485.73,3189.27 3486.34,3188.66
VDD: C1.2 C4.1 C6.2 C13.2 C15.1 D2.2 J2.30 J2.31 MCU1.1 MCU1.13 MCU1.19 MCU1.32 MCU1.48 MCU1.64 R5.1 R8.1 U1.5 U2.23 U2.24 U3.4 U3.5 U4.3 U4.4 | length 6139.3
  Top Layer w8: v1(4175.63,3110.63) 4195.2,3130.2 ; U2.23 4179.5,3145.9 4195.2,3130.2 ; U2.24 4195.2,3130.2
  Top Layer w10: 3685,3110.63 3987.12,3110.63 4010,3133.51 ; C6.2 4010,3133.51 ; v1(4175.63,3110.63) 4032.88,3110.63 4010,3133.51
  Top Layer w16: U1.5 3362.4,2995.83 3363.23,2995 v2(3620,2995) 3645,3020 3645,3070.63 3685,3110.63 3685,3178.04 3685.32,3178.36 3685.32,3187.41 3702.91,3205 C4.1
  Bottom Layer w8: 3699,2896 3699,2877.26 3708.72,2867.54 MCU1.64
  Bottom Layer w10: C15.1 3665,2023.5 3677.5,2011 3679,2011 3700,1990 3995.63,1990 ; 3699,2896 C1.2 ; MCU1.48 3843.95,2573.69 3863,2592.74 3863,2842 3764,2941 3710,2941 C1.2 ; MCU1.13 4080.17,3015.17 v1(4175.63,3110.63) 4226,3161 4356,3161 ; U4.3 4158.62,2410 ; MCU1.32 4158.62,2572.26 ; U3.5 4356,3161 ; U3.4 4393.4,3161 ; J2.31 4367.85,2876.85 4319.17,2828.17 MCU1.19 4181.17,2828.17 4170,2817 4170,2730 4152,2712 4051,2712 ; R5.1 3995.63,1990 ; J2.30 4635.15,3044.85 4620,3060 4430,3060 4404,3086 4404,3087.5 4391.5,3100 C13.2 4393.4,3103.4 4393.4,3161 ; C1.2 3699,2984 3712,2997 3838.09,2997 3843.95,2991.14 MCU1.1 3843.95,2919.05 4051,2712 ; 3995.63,1990 R8.1 4097.8,2131.73 4130,2163.94 4130,2292.31 U4.4 4131.06,2382.44 4158.62,2410 ; 4051,2712 4158.62,2604.38 4158.62,2572.26 ; 4158.62,2410 4158.62,2572.26 ; 4356,3161 4393.4,3161
  Bottom Layer w16: v2(3620,2995) 3688,2995 3699,2984
XTALA: C11.1 MCU1.5 Y2.2 | length 419.7
  Bottom Layer w10: C11.1@3883.37,3328.63 3881.87,3328.63 3868.37,3315.13 3868.37,3313.63 3851.83,3297.09 Y2.2 3851.83,3126.17 3922.69,3055.31 MCU1.5
XTALB: C12.1 MCU1.6 Y2.1 | length 418.9
  Bottom Layer w10: MCU1.6 3942.37,3055.31 4013.23,3126.17 Y2.1 4013.23,3297.09 C12.1
XTALC: C9.1 MCU1.3 Y1.2 | length 348.4
  Bottom Layer w8: C9.1 Y1.2 3754.24,3118.87 3789.36,3118.87 3883.32,3024.91 MCU1.3
XTALD: C10.1 MCU1.4 Y1.1 | length 526
  Bottom Layer w8: C10.1@3734.62,3314 Y1.1 ; C10.1 Y1.1 ; MCU1.4 3903,3035.22 3789,3149.22 3789,3219.22 3779.12,3229.1 3754.24,3229.1 Y1.1
pads on no net: COM1.0 COM1.A8 COM1.B8 J1. J1.4 J1.30 J1.31 J2. J2.1 J2.2 J2.5 J2.6 J2.7 J2.8 J2.9 J2.18 J2.20 U1.4 U2.1 U2.2 U2.3 U2.6 U2.7 U2.8 U2.9 U2.10 U2.11 U2.12 U2.13 U2.14 U2.15 U2.16 U2.19 U2.20 U2.21 U2.22 U2.25 U2.28

## Polygon pours and split planes (outlines as drawn)
GND on Bottom Layer "GND_L02_P003" (solid, remove dead copper, pour order 3): 3088.18,3541.31 4958.26,3541.31 4958.26,1868.08 3088.18,1868.08
VDD on Bottom Layer "VDD_L02_P000" (solid, remove dead copper, pour order 0): 3950.5,2810 3950.5,2696 4069.5,2696 4069.5,2735.5 3995,2810
GND on Top Layer "NONET_L-01_P-001" (solid, remove dead copper, pour order 7): 3031.5,3543.31 4960.63,3543.31 4960.63,1811.02 3031.5,1811.02
VDD on Top Layer "VDD_L01_P001" (solid, remove dead copper, pour order 1): 3640,3255 3750,3255 3750,3104 3711,3065 3650,3065 3640,3075

## Keep-outs
Keep-Out Layer:
  the board outline again, w5

## Silkscreen, mask and mechanical layers (free items; w line width, h text height)
Top Overlay:
  drawing of 789 lines, arcs and shapes, not listed
  text "-ARM" at 3395,2550 h120 r90
  text "Cavendish" at 3277.52,2223 h160 r90
  text "RST" at 4530,1945.74 h80
Bottom Overlay:
  lines w5: 3662.17,2486 3714.17,2538 ; 4269,2538 4321,2486
  text "Touch" at 4674.91,3255.93 h100
  text "BOOT" at 4605,3144.55 h60
  text "3V3" at 4709.26,3000 h80 r90
  text "MCU" at 4420,2935.93 h100
  text "LCD" at 3975,2015.92 h100
Top Solder:
  circle w10: c3308.22,2443.78 r11.02
  lines w10: 3875,3305 4070,3305 ; 3965,3405 3980,3390 ; 3980,3375 3980,3390 ; 3995,3405 3980,3390
  lines w16: 3308.08,2443.65 3308.35,2443.92
  lines w30: 3632.84,3282.52 3633.11,3282.8 ; 3633.55,3232.55 3633.82,3232.82
  text "3.14" at 3940,3320.74 h80
  text "V" at 3880,3320 h90
Mechanical 15:
  lines w5: 3085,1930 3227.68,1930 ; 3117.26,2008.74 3227.68,2008.74 3227.68,1906.32 ; 3118.28,2225.28 3326.1,2225.28 3326.1,1901.9 ; 3123.94,3426.06 3227.68,3426.06 ; 3148.94,1875 3148.94,2008.74 ; 3148.94,3347.32 3148.94,3457 ; 4585.94,2225.28 4585.94,2008.74 4645,2008.74 ; 4645,1930 4748.74,1930 ; 4723.74,1899.06 4723.74,2008.74
  text "5.5MM" at 3135.72,2064 h30 r90
  text "38MM" at 3100.44,1967 h60 r90
  text "2MM" at 3136,1941.03 h30 r90
  text "2MM" at 3159.03,1906 h30
  text "2.5MM" at 3240.03,1906.28 h30
  text "40MM" at 3172,1861.56 h60

## Text inside footprints (layer, text, board x,y; h text height)
U4: Bottom Overlay "1" at 4203.37,2228.01 h60 r180